# Altium PCB 电机控制.PcbDoc (part 3 of 4)
Units mil, origin at the board's own origin, x right, y up, seen from the top; angles counter-clockwise.
Board outline 4818.9 x 3440.94 mil, 2 copper layers (Top Layer, Bottom Layer); 168 components, 177 nets, 592 pads, 87 vias.
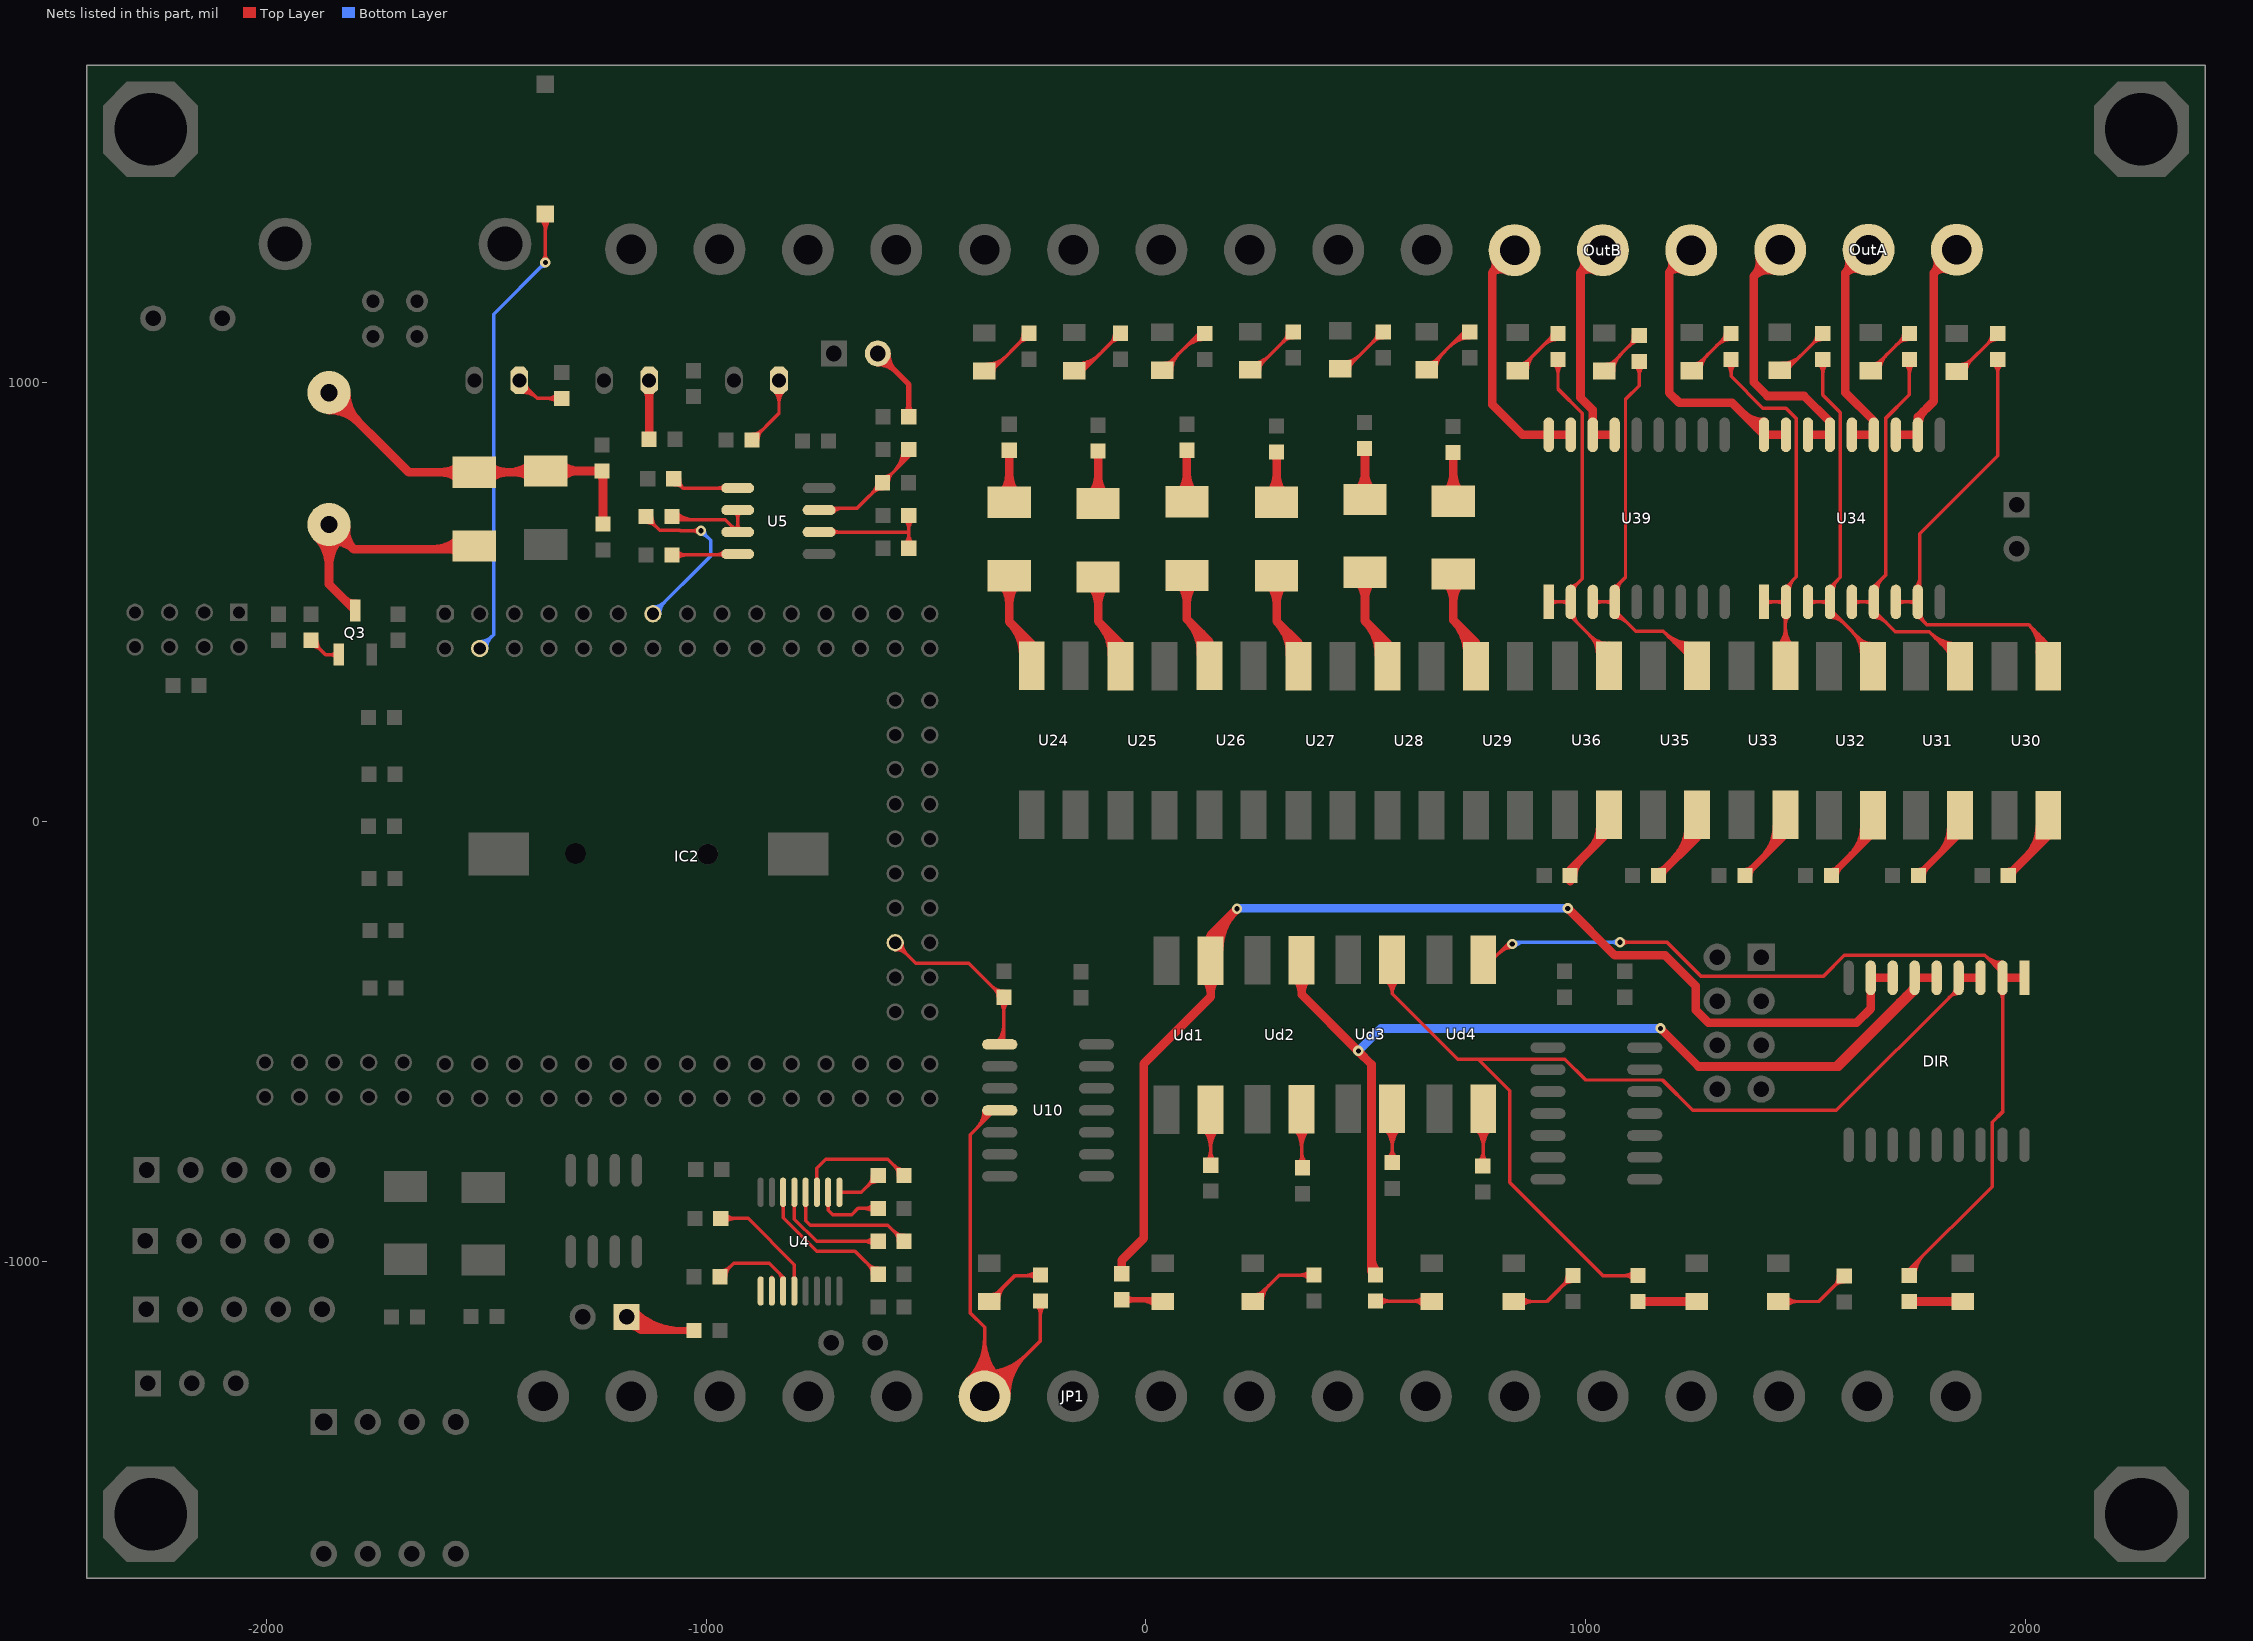
[diagram p3: the nets of this part, all layers, seen from the top]

## Via types
v1: diameter 23.62, hole 11.81, Top Layer to Bottom Layer, 87 vias

## Nets (pads, with @x,y where several pads share a name; then routed paths per layer and width w, separated by ;. In a path a pad name is that pad's centre, name@x,y a point inside that pad or via, vN(x,y) a via of type N, cw(c..) or ccw(c..) an arc to the next point about the centre after c; other vN are vias at no path point) (continued)
NetC18_1: C18.1 C19.1 D8.K D9.K U3.1 | length 1428.6
  Top Layer w19.68: U3.1@-1858,936.63 cw(c-1858,841.58) -1790.79,908.79 cw(c-1723.58,976) U3.1@-1818.63,976 ; U3.1@-1858,976 -1676.82,794.82 -1626,794.82 D8.K@-1527.95,794.82 D9.K@-1367.95,794.82 ; D8.K@-1559.83,776.72 ccw(c-1603.51,733.04) -1603.51,794.82 ccw(c-1603.51,856.6) D8.K@-1559.83,812.91 ; D8.K@-1496.08,776.72 cw(c-1452.39,733.04) -1452.39,794.82 cw(c-1452.39,856.6) D8.K@-1496.08,812.91 ; -1447.76,794.82 ccw(c-1447.76,866.84) D9.K@-1396.83,815.91 ; -1433.27,794.82 cw(c-1433.27,743.28) D9.K@-1396.83,779.72 ; D9.K@-1364.95,797.82 -1236.82,797.82 -1235,796 C18.1@-1235,677 ; D9.K@-1333.08,779.72 cw(c-1289.39,736.04) -1289.39,797.82 cw(c-1289.39,859.6) D9.K@-1333.08,815.91 ; -1255.49,797.82 ccw(c-1255.49,816.49) C19.1@-1242.29,803.29 ; -1254.62,797.82 cw(c-1254.62,780.37) -1242.29,792.71 cw(c-1259.89,775.11) -1235,775.11 ; C18.1@-1240.29,682.29 ccw(c-1253.06,695.06) -1235,695.06 ccw(c-1216.94,695.06) C18.1@-1229.71,682.29
NetC21_1: C21.1 U4.1 | length 166
  Top Layer w7.87: U4.1@-697.36,-842.73 -647.32,-842.73 C21.1@-609.17,-804.58 ; U4.1@-695.27,-844.82 cw(c-690.23,-849.86) -690.23,-842.73 cw(c-690.23,-835.61) U4.1@-695.27,-840.65 ; C21.1@-622.56,-804.58 cw(c-654.87,-804.58) -632.02,-827.43 cw(c-609.17,-850.28) C21.1@-609.17,-817.97
NetC21_2: C21.2 U4.3 | length 338.8
  Top Layer w7.87: U4.3@-750.63,-814.07 ccw(c-755.67,-809.03) -748.54,-809.03 ccw(c-741.41,-809.03) U4.3@-746.45,-814.07 ; U4.3@-748.54,-842.73 -748.54,-787.91 -728.35,-767.72 -586.98,-767.72 C21.2@-550.12,-804.58 ; C21.2@-563.5,-804.58 ccw(c-595.82,-804.58) -572.97,-781.73 ccw(c-550.12,-758.88) C21.2@-550.12,-791.2
NetC22_1: C22.1 U4.5 | length 334.4
  Top Layer w7.87: U4.5@-801.81,-871.4 cw(c-806.85,-876.44) -799.72,-876.44 cw(c-792.6,-876.44) U4.5@-797.64,-871.4 ; U4.5@-799.72,-842.73 -799.72,-903.65 -749.19,-954.19 C22.1@-609.17,-954.19 ; C22.1@-618.64,-963.65 ccw(c-641.49,-986.5) -641.49,-954.19 ccw(c-641.49,-921.87) C22.1@-618.64,-944.72
NetC22_2: C22.2 U4.4 | length 369.8
  Top Layer w7.87: U4.4@-776.22,-871.4 cw(c-781.26,-876.44) -774.13,-876.44 cw(c-767.01,-876.44) U4.4@-772.05,-871.4 ; U4.4@-774.13,-842.73 -774.13,-906.97 -763.78,-917.32 -586.98,-917.32 C22.2@-550.12,-954.19 ; C22.2@-563.5,-954.19 ccw(c-595.82,-954.19) -572.97,-931.34 ccw(c-550.12,-908.49) C22.2@-550.12,-940.8
NetC23_1: C23.1 U4.2 | length 226.6
  Top Layer w7.87: U4.2@-725.04,-871.4 cw(c-730.08,-876.44) -722.95,-876.44 cw(c-715.82,-876.44) U4.2@-720.86,-871.4 ; U4.2@-722.95,-842.73 -722.95,-883.35 -712.6,-893.7 -669.29,-893.7 -654.98,-879.39 C23.1@-609.17,-879.39 ; C23.1@-618.64,-888.85 ccw(c-641.49,-911.7) -641.49,-879.39 ccw(c-641.49,-847.07) C23.1@-618.64,-869.92
NetC24_1: C24.1 U4.6 | length 389
  Top Layer w7.87: U4.6@-827.4,-871.4 cw(c-832.44,-876.44) -825.31,-876.44 cw(c-818.19,-876.44) U4.6@-823.23,-871.4 ; U4.6@-825.31,-842.73 -825.31,-900.33 -749.27,-976.38 -661.79,-976.38 C24.1@-609.17,-1028.99 ; C24.1@-622.56,-1028.99 ccw(c-654.87,-1028.99) -632.02,-1006.14 ccw(c-609.17,-983.29) C24.1@-609.17,-1015.61
NetD8_A: D8.A Q3.3 U3.2 | length 962.9
  Top Layer w19.68: U3.2@-1885.84,648.16 cw(c-1953.05,580.95) -1858,580.95 cw(c-1762.95,580.95) U3.2@-1830.16,648.16 ; U3.2@-1852.61,637 cw(c-1844.4,577.6) -1802,620 ; -1823.87,505.88 ccw(c-1798,531.75) Q3.3@-1798,495.16 ; U3.2@-1819,670.61 ccw(c-1759.6,662.4) -1802,620 ; Q3.3@-1798,480 -1858,540 U3.2@-1858,676 -1802,620 ; -1621.61,620 ccw(c-1621.61,707.37) D8.A@-1559.83,645.59 ; -1585.42,620 cw(c-1585.42,583.81) D8.A@-1559.83,609.4 ; D8.A@-1527.95,627.49 -1535.45,620 -1802,620
NetD24_A: D24.A U24.2 | length 449
  Top Layer w19.68: D24.A@-329.05,541.4 cw(c-372.73,497.72) -310.95,497.72 cw(c-249.17,497.72) D24.A@-292.86,541.4 ; D24.A@-310.95,559.5 -310.95,454.95 -259.82,403.82 U24.2@-259.82,354.81 ; -309.98,453.98 cw(c-383.56,380.4) U24.2@-279.5,380.4 ; -276.38,420.38 cw(c-316.35,380.4) U24.2@-259.82,380.4
NetD24_K: D24.K R64.1 | length 243.5
  Top Layer w19.68: D24.K@-329.05,744.91 ccw(c-372.73,788.6) -310.95,788.6 ccw(c-249.17,788.6) D24.K@-292.86,744.91 ; R64.1@-316.29,839.71 cw(c-329.18,826.82) -310.95,826.82 ; D24.K@-310.95,726.82 R64.1@-310.95,844.95 ; -310.95,827.06 cw(c-293.06,827.06) R64.1@-305.71,839.71
NetD25_A: D25.A U25.2 | length 453.7
  Top Layer w19.68: D25.A@-127.05,538.4 cw(c-170.73,494.72) -108.95,494.72 cw(c-47.17,494.72) D25.A@-90.86,538.4 ; D25.A@-108.95,556.5 -108.95,455.95 ; U25.2@-77.5,379.5 ccw(c-184.87,380.03) -108.95,455.95 ; -75.58,422.58 cw(c-118.46,379.7) U25.2@-57.82,379.4 ; U25.2@-57.82,353.81 -57.82,404.82 -108.95,455.95
NetD25_K: D25.K R65.1 | length 244.5
  Top Layer w19.68: D25.K@-127.05,741.91 ccw(c-170.73,785.6) -108.95,785.6 ccw(c-47.17,785.6) D25.K@-90.86,741.91 ; R65.1@-114.29,837.71 cw(c-127.18,824.83) -108.95,824.83 ; D25.K@-108.95,723.82 R65.1@-108.95,842.95 ; -108.95,825.06 cw(c-91.06,825.06) R65.1@-103.71,837.71
NetD26_A: D26.A U26.2 | length 465.9
  Top Layer w19.68: D26.A@74.95,542.4 cw(c31.27,498.72) 93.05,498.72 cw(c154.83,498.72) D26.A@111.14,542.4 ; D26.A@93.05,560.5 93.05,460.95 ; U26.2@124.51,381.09 ccw(c16.95,384.85) 93.05,460.95 ; 125.06,428.94 cw(c78.81,382.69) U26.2@144.18,380.4 ; U26.2@144.18,354.81 144.18,409.82 93.05,460.95
NetD26_K: D26.K R66.1 | length 242.5
  Top Layer w19.68: D26.K@74.95,745.91 ccw(c31.27,789.6) 93.05,789.6 ccw(c154.83,789.6) D26.K@111.14,745.91 ; R66.1@87.71,839.71 cw(c74.83,826.83) 93.05,826.83 ; D26.K@93.05,727.82 R66.1@93.05,844.95 ; 93.05,827.05 cw(c110.95,827.05) R66.1@98.29,839.71
NetD27_A: D27.A U27.2 | length 456.5
  Top Layer w19.68: D27.A@278.95,541.4 cw(c235.27,497.72) 297.05,497.72 cw(c358.83,497.72) D27.A@315.14,541.4 ; D27.A@297.05,559.5 297.05,455.95 ; U27.2@327.5,379.87 ccw(c223.46,382.36) 297.05,455.95 ; 329.55,423.45 cw(c286.94,380.84) U27.2@347.18,379.4 ; U27.2@347.18,353.81 347.18,405.82 297.05,455.95
NetD27_K: D27.K R67.1 | length 239.5
  Top Layer w19.68: D27.K@278.95,744.91 ccw(c235.27,788.6) 297.05,788.6 ccw(c358.83,788.6) D27.K@315.14,744.91 ; R67.1@291.71,835.71 cw(c278.83,822.83) 297.05,822.83 ; D27.K@297.05,726.82 R67.1@297.05,840.95 ; 297.05,823.05 cw(c314.95,823.05) R67.1@302.29,835.71
NetD28_A: D28.A U28.2 | length 467.3
  Top Layer w19.68: D28.A@479.91,549.55 cw(c436.22,505.86) 498,505.86 cw(c559.78,505.86) D28.A@516.1,549.55 ; D28.A@498,567.64 498,457 ; U28.2@529.5,379.64 ccw(c421.95,380.94) 498,457 ; 531.04,423.96 cw(c487.23,380.15) U28.2@549.18,379.4 ; U28.2@549.18,353.81 549.18,405.82 498,457
NetD28_K: D28.K R68.1 | length 228.9
  Top Layer w19.68: D28.K@479.91,751.09 ccw(c436.22,794.78) 498,794.78 ccw(c559.78,794.78) D28.K@516.1,751.09 ; R68.1@491.71,843.71 cw(c476.52,828.52) 498,828.52 ; D28.K@498,733 R68.1@498,848
NetD29_A: D29.A U29.2 | length 467.8
  Top Layer w19.68: D29.A@680.91,545.55 cw(c637.22,501.86) 699,501.86 cw(c760.78,501.86) D29.A@717.1,545.55 ; D29.A@699,563.64 699,459 ; U29.2@730.5,379.94 ccw(c622.86,382.86) 699,459 ; 731.36,426.64 cw(c685.87,381.15) U29.2@750.18,379.4 ; U29.2@750.18,353.81 750.18,407.82 699,459
NetD29_K: D29.K R69.1 | length 223.9
  Top Layer w19.68: D29.K@680.91,747.09 ccw(c637.22,790.78) 699,790.78 ccw(c760.78,790.78) D29.K@717.1,747.09 ; R69.1@692.71,834.71 cw(c677.53,819.53) 699,819.53 ; D29.K@699,729 R69.1@699,839
NetDdir1_A: Ddir1.A Rd5.2 | length 190.2
  Top Layer w11.81: Rd5.2@-55,-1087.06 34.05,-1087.06 Ddir1.A@38,-1091 ; Rd5.2@-46.93,-1095.13 cw(c-27.44,-1114.62) -27.44,-1087.06 cw(c-27.44,-1059.49) Rd5.2@-46.93,-1078.98 ; -10.7,-1087.06 cw(c-10.7,-1133.8) Ddir1.A@22.35,-1100.75 ; 8.36,-1087.06 ccw(c8.36,-1067.27) Ddir1.A@22.35,-1081.26
NetDdir1_K: 
NetDdir2_A: Ddir2.A Rd6.2 | length 256.3
  Top Layer w7.87: Rd6.2@522,-1090.06 649.05,-1090.06 Ddir2.A@650,-1091 ; Rd6.2@531.47,-1099.52 cw(c554.32,-1122.37) 554.32,-1090.06 cw(c554.32,-1057.74) Rd6.2@531.47,-1080.59 ; 603.79,-1090.06 cw(c603.79,-1131.31) Ddir2.A@632.96,-1102.14 ; 608.37,-1090.06 ccw(c608.37,-1055.27) Ddir2.A@632.96,-1079.87 ; 622.8,-1090.06 cw(c622.8,-1112.3) Ddir2.A@638.53,-1096.57
NetDdir3_A: Ddir3.A Rd7.2 | length 199.6
  Top Layer w19.68: Rd7.2@1119,-1091.06 Ddir3.A@1252.95,-1091.06 ; Rd7.2@1124.29,-1096.34 cw(c1137.06,-1109.11) 1137.06,-1091.06 cw(c1137.06,-1073) Rd7.2@1124.29,-1085.77 ; 1223.21,-1091.06 ccw(c1223.21,-1067.12) Ddir3.A@1240.14,-1084.04 ; 1223.46,-1091.06 cw(c1223.46,-1114.64) Ddir3.A@1240.14,-1097.96
NetDdir4_A: Ddir4.A Rd8.2 | length 186.6
  Top Layer w19.68: Rd8.2@1736,-1091.06 Ddir4.A@1856.95,-1091.06 ; Rd8.2@1741.29,-1096.34 cw(c1754.06,-1109.11) 1754.06,-1091.06 cw(c1754.06,-1073) Rd8.2@1741.29,-1085.77 ; 1827.2,-1091.06 ccw(c1827.2,-1067.1) Ddir4.A@1844.14,-1084.04 ; 1827.47,-1091.06 cw(c1827.47,-1114.63) Ddir4.A@1844.14,-1097.96
NetDIR_1: DIR.1 DIR.2 Rd8.1 Ud4.3 | length 2460.1
  Top Layer w7.87: Ud4.3@767,-314.23 787.77,-314.23 824,-278 v1(833,-278) ccw(c833,-299.73) 817.64,-284.36 ; 804.19,-297.81 cw(c833,-326.61) v1@833,-285.87 ; v1(1078,-274) 1185,-274 1261.81,-350.81 1541.22,-350.81 1588.22,-303.82 1907.79,-303.82 1948,-344.03 DIR.2@1948,-355 1948,-660.12 1924.38,-683.74 1924.38,-829.62 1736,-1018 Rd8.1@1736,-1032 ; v1@1083.57,-279.57 cw(c1097.01,-293.01) 1097.01,-274 cw(c1097.01,-254.99) v1@1083.57,-268.43 ; Rd8.1@1733.64,-1032 cw(c1761.73,-1032) 1741.87,-1012.13 ; Rd8.1@1741.51,-1032 cw(c1788.62,-1032) 1755.31,-998.69 ; Rd8.1@1749.39,-1032 cw(c1815.5,-1032) 1768.75,-985.25 ; 1907.79,-303.82 ccw(c1945.89,-265.72) DIR.2@1947.73,-319.57 ; 1920.6,-316.64 ccw(c1946.74,-290.5) DIR.2@1948,-327.44 ; 1933.42,-329.45 ccw(c1947.59,-315.29) DIR.2@1948.27,-335.31 ; DIR.2@1942.43,-388.13 cw(c1928.99,-401.57) 1948,-401.57 cw(c1967.01,-401.57) DIR.2@1953.57,-388.13 ; DIR.2@1946.24,-342.27 ccw(c1948.43,-340.08) DIR.2@1948.54,-343.18
  Top Layer w19.68: DIR.2@1948,-355 DIR.1@1998,-355
  Bottom Layer w7.87: v1(833,-278) 837,-274 v1(1078,-274) ; v1@838.57,-283.57 cw(c861.67,-306.67) 861.67,-274 ; v1@1072.43,-279.57 ccw(c1058.99,-293.01) 1058.99,-274 ccw(c1058.99,-254.99) v1@1072.43,-268.43
NetDIR_3: DIR.3 DIR.4 Rd7.1 Ud3.3 | length 2554.1
  Top Layer w7.87: Ud3.3@544.65,-360.29 cw(c521.62,-391) 560,-391 ; Ud3.3@549.37,-353.99 cw(c533.43,-375.25) 560,-375.25 cw(c586.57,-375.25) Ud3.3@570.63,-353.99 ; Ud3.3@560,-314.23 560,-391 ; Ud3.3@575.35,-360.29 ccw(c598.38,-391) 560,-391 ; 755.19,-539.65 827,-611.46 827,-820.41 1038.59,-1032 Rd7.1@1119,-1032 ; Rd7.1@1109.54,-1041.46 ccw(c1086.68,-1064.32) 1086.68,-1032 ccw(c1086.68,-999.68) Rd7.1@1109.54,-1022.53 ; 1827.28,-399.01 cw(c1848,-419.74) DIR.4@1848,-390.43 ; 1837.57,-388.72 ccw(c1831.41,-382.56) DIR.4@1840.13,-382.56 ; DIR.4@1848,-355 1848,-378.29 1570.3,-656 1243.32,-656 1174.6,-587.28 999.84,-587.28 952.22,-539.65 708.65,-539.65 560,-391
  Top Layer w19.68: DIR.4@1848,-355 DIR.3@1898,-355
NetDIR_5: DIR.5 DIR.6 Rd6.1 Ud2.3 | length 2729.7
  Top Layer w7.87: 1555,-561 1559.28,-556.72 1748,-368 DIR.6@1748,-355 ; 1709.71,-406.29 cw(c1748,-444.59) DIR.6@1748,-390.43 ; 1723.15,-392.85 cw(c1748,-417.71) DIR.6@1748,-382.56 ; DIR.6@1736.59,-379.41 cw(c1748,-390.82) DIR.6@1748,-374.68
  Top Layer w19.68: Ud2.3@340.08,-354.74 cw(c306.48,-388.34) 354,-388.34 cw(c401.52,-388.34) Ud2.3@367.92,-354.74 ; Ud2.3@354,-315.23 354,-393 v1@483,-522 ; v1(483,-521) v1@483,-522 ; 512.76,-990.62 ccw(c562.38,-990.62) Rd6.1@527.29,-1025.71 ; Rd6.1@522,-1031 512.76,-1021.75 512.76,-551.76 v1@483,-522 ; v1(1170,-470) 1256.72,-556.72 1559.28,-556.72 1575.28,-556.72 1748,-384 DIR.6@1748,-368 ; DIR.6@1748,-355 DIR.5@1798,-355
  Bottom Layer w19.68: v1@482,-522 534,-470 v1(1170,-470)
NetDIR_7: DIR.7 DIR.8 Rd5.1 Ud1.3 | length 2954.4
  Top Layer w19.68: Rd5.1@-60.29,-1022.71 ccw(c-73.22,-1009.77) -54.93,-1009.77 ; Rd5.1@-54.93,-1028 -54.93,-996.93 -5.31,-947.31 -5.31,-550.31 147,-398 Ud1.3@147,-316.23 147,-258 ; -54.93,-1010.11 ccw(c-37.11,-1010.11) Rd5.1@-49.71,-1022.71 ; Ud1.3@133.08,-355.74 cw(c99.48,-389.34) 147,-389.34 cw(c194.52,-389.34) Ud1.3@160.92,-355.74 ; Ud1.3@137.82,-273.23 ccw(c129.79,-258) 147,-258 ; Ud1.3@147,-290.64 cw(c225.8,-290.64) 170.08,-234.92 ; Ud1.3@156.18,-273.23 cw(c164.22,-258) 147,-258 ; Ud1.3@166.69,-290.64 cw(c293.01,-290.64) v1@203.68,-201.32 ; v1(207,-198) 147,-258 ; v1(959.12,-196.88) 1065.77,-303.53 1180.53,-303.53 1250.28,-373.28 1250.28,-428.18 1278.82,-456.72 1616.28,-456.72 1648,-425 DIR.8@1648,-355 DIR.7@1698,-355
  Bottom Layer w19.68: v1(207,-198) 208.12,-196.88 v1(959.12,-196.88)
NetJ9_1: J9.1 R15.2 | length 546.5
  Top Layer w15.75: J9.1@-1188.06,-1132.94 ccw(c-1129.98,-1074.87) -1129.98,-1157 ; J9.1@-1181.1,-1125.98 -1150.09,-1157 ; J9.1@-1178.26,-1147.45 cw(c-1173.84,-1180.76) -1150.09,-1157 ; J9.1@-1176.93,-1121.81 ccw(c-1091.97,-1036.85) -1091.97,-1157 ; J9.1@-1165.79,-1110.67 ccw(c-1053.95,-998.83) -1053.95,-1157 ; J9.1@-1159.64,-1128.83 ccw(c-1126.33,-1133.24) -1150.09,-1157 ; R15.2@-1034.74,-1163.68 ccw(c-1050.87,-1179.81) -1050.87,-1157 ccw(c-1050.87,-1134.19) R15.2@-1034.74,-1150.32 ; R15.2@-1028.06,-1157 -1150.09,-1157
NetLED1_A: LED1.A R1.2 | length 246.7
  Top Layer w7.87: LED1.A@-1425.2,1003.94 -1384.2,962.94 ; LED1.A@-1424.23,984.31 cw(c-1420.14,949.95) -1395.68,974.42 ; LED1.A@-1423.3,976.49 cw(c-1417.7,929.46) -1384.21,962.95 ; LED1.A@-1409.13,992.44 ccw(c-1398.12,992.44) LED1.A@-1405.91,984.65 ; R1.2@-1338.46,953.48 ccw(c-1361.32,930.63) -1361.32,962.95 ccw(c-1361.32,995.26) R1.2@-1338.46,972.41 ; R1.2@-1329,962.94 -1384.2,962.94
NetLED2_A: LED2.A R16.2 | length 200.9
  Top Layer w19.68: LED2.A@-1137.1,985.25 cw(c-1154.44,967.91) -1129.92,967.91 cw(c-1105.4,967.91) LED2.A@-1122.74,985.25 ; R16.2@-1135.34,875.29 ccw(c-1148.44,888.38) -1129.92,888.38 ; R16.2@-1130.05,870 -1129.92,870.13 LED2.A@-1129.92,1003.94 ; -1129.92,887.73 ccw(c-1112.32,887.73) R16.2@-1124.77,875.29
NetLED3_A: LED3.A R17.2 | length 273
  Top Layer w7.87: R17.2@-895.94,868 -834.65,929.3 LED3.A@-834.65,1003.94 ; R17.2@-895.94,881.39 ccw(c-895.94,913.7) -873.09,890.85 ccw(c-850.24,868) R17.2@-882.56,868 ; LED3.A@-846.01,981.08 cw(c-873.43,953.66) -834.65,953.66 cw(c-795.87,953.66) LED3.A@-823.29,981.08
NetLED10_A: LED10.A R30.2 | length 278.1
  Top Layer w7.87: LED10.A@-357,-1091 -297.94,-1031.95 R30.2@-240,-1031.95 ; LED10.A@-351.09,-1075.26 ccw(c-351.09,-1051.49) -334.29,-1068.3 ; LED10.A@-343.22,-1091 cw(c-309.95,-1091) -333.48,-1067.48 ; LED10.A@-335.35,-1091 cw(c-283.07,-1091) -320.03,-1054.04 ; -274.73,-1031.95 ccw(c-274.73,-996.22) R30.2@-249.46,-1021.48 ; -269.9,-1031.95 cw(c-269.9,-1060.85) R30.2@-249.46,-1040.41
NetLED12_A: LED12.A R32.2 | length 300.5
  Top Layer w7.87: LED12.A@243,-1091 303.06,-1030.95 R32.2@382,-1030.95 ; LED12.A@248.91,-1075.26 ccw(c248.91,-1051.49) 265.71,-1068.3 ; LED12.A@256.78,-1091 cw(c290.05,-1091) 266.52,-1067.48 ; LED12.A@264.65,-1091 cw(c316.93,-1091) 279.97,-1054.04 ; R32.2@372.53,-1040.41 ccw(c349.68,-1063.26) 349.68,-1030.95 ccw(c349.68,-998.63) R32.2@372.53,-1021.48
NetLED14_A: LED14.A R34.2 | length 269.9
  Top Layer w7.87: LED14.A@836,-1091 911.94,-1091 R34.2@971,-1031.95 ; LED14.A@853.04,-1102.14 cw(c879.93,-1129.02) 879.93,-1091 cw(c879.93,-1052.98) LED14.A@853.04,-1079.87 ; R34.2@957.62,-1031.95 cw(c925.3,-1031.95) 948.15,-1054.8 cw(c971,-1077.65) R34.2@971,-1045.33
NetLED16_A: LED16.A R36.2 | length 284.5
  Top Layer w7.87: LED16.A@1438,-1091 1529.94,-1091 R36.2@1588,-1032.95 ; LED16.A@1455.04,-1102.14 cw(c1481.93,-1129.02) 1481.93,-1091 cw(c1481.93,-1052.98) LED16.A@1455.04,-1079.87 ; R36.2@1574.61,-1032.95 cw(c1542.3,-1032.95) 1565.15,-1055.8 cw(c1588,-1078.65) R36.2@1588,-1046.33
NetLED27_A: LED27.A R76.2 | length 277.7
  Top Layer w7.87: LED27.A@1648,1026 1732.24,1110.24 R76.2@1736.22,1110.24 ; LED27.A@1653.9,1041.75 ccw(c1653.9,1065.51) 1670.71,1048.71 ; LED27.A@1661.78,1026 cw(c1695.05,1026) 1671.52,1049.52 ; LED27.A@1669.65,1026 cw(c1721.93,1026) 1684.96,1062.96 ; 1706.57,1084.57 cw(c1736.22,1054.92) R76.2@1736.22,1096.85 ; 1716.19,1094.19 ccw(c1700.14,1110.24) R76.2@1722.84,1110.24 ; R76.2@1720.01,1098.01 cw(c1736.22,1081.8) R76.2@1736.22,1104.73
NetLED28_A: LED28.A R77.2 | length 275.8
  Top Layer w7.87: LED28.A@1441,1027 1456.13,1027 R77.2@1539.37,1110.24 ; LED28.A@1446.91,1034.87 ccw(c1446.91,1076.16) 1476.1,1046.97 ; LED28.A@1446.91,1042.75 ccw(c1446.91,1103.04) 1489.54,1060.41 ; LED28.A@1462.65,1027 cw(c1478.39,1027) 1467.26,1038.13 ; R77.2@1525.99,1110.24 cw(c1493.67,1110.24) 1516.52,1087.39 cw(c1539.37,1064.53) R77.2@1539.37,1096.85
NetLED29_A: LED29.A R78.2 | length 282
  Top Layer w7.87: LED29.A@1241,1026 1325.24,1110.24 R78.2@1330.71,1110.24 ; LED29.A@1246.91,1041.75 ccw(c1246.91,1065.51) 1263.71,1048.71 ; LED29.A@1254.78,1026 cw(c1288.05,1026) 1264.52,1049.52 ; LED29.A@1262.65,1026 cw(c1314.93,1026) 1277.97,1062.96 ; 1298.52,1083.52 cw(c1330.71,1051.33) R78.2@1330.71,1096.85 ; 1311.73,1096.73 ccw(c1298.21,1110.24) R78.2@1317.32,1110.24 ; 1311.96,1096.96 cw(c1330.71,1078.21) R78.2@1330.71,1104.73
NetLED30_A: LED30.A R79.2 | length 253.5
  Top Layer w7.87: LED30.A@1044.68,1025 LED30.A@1042,1025 1122,1105 R79.2@1122,1106.06 ; LED30.A@1047.9,1040.75 ccw(c1047.9,1064.51) 1064.71,1047.71 ; LED30.A@1055.78,1025 cw(c1089.05,1025) 1065.52,1048.52 ; LED30.A@1063.65,1025 cw(c1115.93,1025) 1078.96,1061.96 ; 1098.4,1081.4 ccw(c1073.75,1106.06) R79.2@1108.61,1106.06 ; 1100.95,1083.95 cw(c1122,1062.9) R79.2@1122,1092.67
NetLED31_A: LED31.A R80.2 | length 285.8
  Top Layer w7.87: LED31.A@846,1026 930.24,1110.24 R80.2@937.01,1110.24 ; LED31.A@851.9,1041.75 ccw(c851.9,1065.51) 868.71,1048.71 ; LED31.A@859.78,1026 cw(c893.05,1026) 869.52,1049.52 ; LED31.A@867.65,1026 cw(c919.93,1026) 882.96,1062.97 ; 902.6,1082.6 cw(c937.01,1048.19) R80.2@937.01,1096.85 ; 916.04,1096.04 cw(c937.01,1075.07) R80.2@937.01,1104.73 ; 918.94,1098.94 ccw(c907.65,1110.24) R80.2@923.62,1110.24
NetLED32_A: LED32.A R23.2 | length 282.1
  Top Layer w7.87: LED32.A@-368,1025 -352.06,1025 R23.2@-266,1111.06 ; LED32.A@-362.1,1032.87 ccw(c-362.1,1076.12) -331.52,1045.54 ; LED32.A@-362.1,1040.75 ccw(c-362.1,1103) -318.08,1058.98 ; LED32.A@-346.35,1025 cw(c-332.56,1025) -342.31,1034.75 ; R23.2@-279.39,1111.06 cw(c-311.7,1111.06) -288.85,1088.21 cw(c-266,1065.35) R23.2@-266,1097.67
NetLED33_A: LED33.A R24.2 | length 315.6
  Top Layer w7.87: LED33.A@-163,1026 -143.06,1026 R24.2@-58,1111.06 ; LED33.A@-157.1,1026 ccw(c-157.1,1059.89) -133.13,1035.92 ; LED33.A@-157.1,1033.87 ccw(c-157.1,1086.77) -119.69,1049.37 ; LED33.A@-157.1,1041.75 ccw(c-157.1,1113.65) -106.25,1062.81 ; R24.2@-71.39,1111.06 cw(c-103.7,1111.06) -80.85,1088.21 cw(c-58,1065.35) R24.2@-58,1097.67
NetLED34_A: LED34.A R25.2 | length 326
  Top Layer w7.87: LED34.A@37,1027 120.24,1110.24 R25.2@133.86,1110.24 ; LED34.A@42.9,1042.75 ccw(c42.9,1066.51) 59.71,1049.71 ; LED34.A@50.78,1027 cw(c84.05,1027) 60.52,1050.52 ; LED34.A@58.65,1027 cw(c110.93,1027) 73.96,1063.96 ; 87.76,1077.76 cw(c133.86,1031.65) R25.2@133.86,1096.85 ; 101.2,1091.2 cw(c133.86,1058.54) R25.2@133.86,1104.73 ; 114.64,1104.64 cw(c133.86,1085.42) R25.2@133.86,1112.6
NetLED35_A: LED35.A R26.2 | length 269.3
  Top Layer w7.87: LED35.A@237,1028 248.47,1028 R26.2@334.65,1114.17 ; LED35.A@242.9,1035.87 ccw(c242.9,1068.32) 265.85,1045.38 ; LED35.A@242.9,1043.75 ccw(c242.9,1095.2) 279.29,1058.82 ; LED35.A@258.65,1028 cw(c283.24,1028) 265.85,1045.38 ; R26.2@321.26,1114.17 cw(c288.94,1114.17) 311.79,1091.32 cw(c334.65,1068.47) R26.2@334.65,1100.79
NetLED36_A: LED36.A R27.2 | length 271.5
  Top Layer w7.87: LED36.A@442,1030 455.2,1030 R27.2@539.37,1114.17 ; LED36.A@447.91,1037.87 ccw(c447.91,1074.49) 473.8,1048.6 ; LED36.A@447.91,1045.75 ccw(c447.91,1101.37) 487.24,1062.04 ; LED36.A@463.65,1030 cw(c484.07,1030) 469.63,1044.43 ; R27.2@525.99,1114.17 cw(c493.67,1114.17) 516.52,1091.32 cw(c539.37,1068.47) R27.2@539.37,1100.79
NetLED37_A: LED37.A R28.2 | length 301.3
  Top Layer w7.87: LED37.A@638,1028 724.18,1114.17 R28.2@736.22,1114.17 ; LED37.A@643.91,1043.75 ccw(c643.91,1067.51) 660.71,1050.71 ; LED37.A@651.78,1028 cw(c685.05,1028) 661.52,1051.52 ; LED37.A@659.65,1028 cw(c711.93,1028) 674.97,1064.97 ; 692.81,1082.81 cw(c736.22,1039.39) R28.2@736.22,1100.79 ; 706.25,1096.25 cw(c736.22,1066.28) R28.2@736.22,1108.66
NetLED260_A: LED260.A R750.2 | length 255.8
  Top Layer w7.87: LED260.A@1844,1024 1850.77,1024 R750.2@1937.01,1110.24 ; LED260.A@1849.91,1031.87 ccw(c1849.91,1052.97) LED260.A@1864.82,1038.05 ; LED260.A@1849.91,1039.75 ccw(c1849.91,1079.85) 1878.26,1051.49 ; LED260.A@1865.65,1024 cw(c1901.59,1024) 1876.18,1049.41 ; R750.2@1923.62,1110.24 cw(c1891.31,1110.24) 1914.16,1087.39 cw(c1937.01,1064.53) R750.2@1937.01,1096.85
NetP1_2: P1.2 R485.1 | length 305.9
  Top Layer w11.81: P1.2@-610,1041.38 cw(c-610,984.35) -569.68,1024.68 cw(c-529.35,1065) P1.2@-586.38,1065 ; P1.2@-610,1065 -539.37,994.37 R485.1@-539.37,921.26 ; R485.1@-547.44,929.33 ccw(c-566.93,948.82) -539.37,948.82 ccw(c-511.81,948.82) R485.1@-531.3,929.33
NetQ3_1: Q3.1 R2.2 | length 168.3
  Top Layer w7.87: R2.2@-1899,399.56 cw(c-1899,367.24) -1876.15,390.09 cw(c-1853.3,412.94) R2.2@-1885.62,412.94 ; R2.2@-1895.47,402.47 R2.2@-1899,412.94 -1866.06,380 Q3.1@-1836,380 ; Q3.1@-1841.57,374.43 ccw(c-1855.01,360.99) -1855.01,380 ccw(c-1855.01,399.01) Q3.1@-1841.57,385.57
NetR3_2: R3.2 U4.12 | length 332.7
  Top Layer w7.87: R3.2@-966.95,-902 -905,-902 -799.72,-1007.28 U4.12@-799.72,-1067.14 ; R3.2@-957.48,-911.47 cw(c-934.63,-934.32) -934.63,-902 cw(c-934.63,-869.68) R3.2@-957.48,-892.54 ; U4.12@-801.81,-1038.48 ccw(c-806.85,-1033.44) -799.72,-1033.44 ccw(c-792.6,-1033.44) U4.12@-797.64,-1038.48
NetR4_2: R4.2 U4.11 | length 266.7
  Top Layer w7.87: R4.2@-968.95,-1035 -937.95,-1004 -857,-1004 -825.31,-1035.69 U4.11@-825.31,-1067.14 ; R4.2@-968.95,-1021.61 ccw(c-968.95,-989.3) -946.09,-1012.15 ccw(c-923.24,-1035) R4.2@-955.56,-1035 ; -833.81,-1027.19 cw(c-847.18,-1040.57) U4.11@-828.27,-1040.57
NetR5_2: U4.10 | length 30.9
  Top Layer w7.87: U4.10@-850.9,-1067.14 U4.10@-850.9,-1036.27
NetR6_2: U4.9
NetR7_2: R7.2 U5.1 | length 228.5
  Top Layer w7.87: R7.2@-1073.94,780 -1052.94,759 ; R7.2@-1073.12,766.64 cw(c-1071.51,740.43) -1052.94,759 ; R7.2@-1060.58,779.18 ccw(c-1034.38,777.57) -1052.94,759 ; U5.1@-959.68,753.43 ccw(c-973.12,739.99) -973.12,759 ccw(c-973.12,778.01) U5.1@-959.68,764.57 ; U5.1@-928.52,759 -1052.94,759
NetR8_2: R8.2 U5.2 U5.3 | length 347
  Top Layer w7.87: R8.2@-1077.94,694 -1070.95,687 -956.52,687 U5.3@-928.52,659 U5.2@-928.52,709 ; R8.2@-1074.05,697.9 ccw(c-1047.74,724.2) -1047.74,687 ; R8.2@-1068.48,703.46 ccw(c-1028.73,743.21) -1028.73,687 ; U5.3@-934.09,664.57 ccw(c-947.53,678.01) -928.52,678.01 ccw(c-909.51,678.01) U5.3@-922.95,664.57 ; U5.2@-934.09,703.43 cw(c-947.53,689.99) -928.52,689.99 cw(c-909.51,689.99) U5.2@-922.95,703.43
NetR9_2: R9.2 U5.4 | length 230.9
  Top Layer w7.87: R9.2@-1077.94,607 -930.52,607 U5.4@-928.52,609 ; R9.2@-1068.48,597.54 cw(c-1045.63,574.68) -1045.63,607 cw(c-1045.63,639.32) R9.2@-1068.48,616.47 ; -977.94,607 ccw(c-977.94,632.83) U5.4@-959.68,614.57 ; -968.3,607 cw(c-968.3,594.81) U5.4@-959.68,603.43
NetR10_1: R10.1 R13.1 U5.6 | length 410.3
  Top Layer w7.87: U5.6@-743.48,659 -539.37,659 ; U5.6@-712.32,653.43 cw(c-698.88,639.99) -698.88,659 cw(c-698.88,678.01) U5.6@-712.32,664.57 ; R13.1@-548.84,631.51 ccw(c-571.69,654.36) -539.37,654.36 ccw(c-507.05,654.36) R13.1@-529.91,631.51 ; R10.1@-548.84,687.38 cw(c-571.69,664.53) -539.37,664.53 cw(c-507.05,664.53) R10.1@-529.91,687.38 ; R13.1@-539.37,622.05 -539.37,659 ; R10.1@-539.37,696.85 -539.37,659
NetR11_1: R11.1 R12.1 U5.7 | length 532.8
  Top Layer w7.87: U5.7@-743.48,709 -738.9,713.58 -680.12,713.58 -656.42,713.58 R11.1@-599,771 -539.37,830.63 R12.1@-539.37,846.46 ; U5.7@-717.89,709 cw(c-706.83,697.94) -706.83,713.58 ; U5.7@-712.32,703.43 cw(c-687.82,678.93) -687.82,713.58 ; R11.1@-612.38,771 cw(c-644.7,771) -621.85,748.15 cw(c-599,725.3) R11.1@-599,757.61 ; R11.1@-599,784.38 ccw(c-599,816.7) -576.15,793.85 ccw(c-553.3,771) R11.1@-585.61,771 ; -573.42,796.58 ccw(c-623.29,846.46) R12.1@-552.76,846.46 ; -559.97,810.02 ccw(c-596.41,846.46) R12.1@-544.88,846.46 ; -546.53,823.47 ccw(c-569.52,846.46) R12.1@-537.01,846.46
NetR70_2: R70.2 U33.2 | length 340.2
  Top Layer w15.75: R70.2@1362.2,-122.05 1454.33,-29.92 U33.2@1454.33,15.75 ; R70.2@1362.2,-112.6 ccw(c1362.2,-89.79) R70.2@1378.33,-105.92 ; R70.2@1371.65,-122.05 cw(c1394.47,-122.05) R70.2@1378.34,-105.91 ; 1403.17,-81.08 ccw(c1331.93,-9.84) U33.2@1432.68,-9.84 ; 1430.05,-54.2 ccw(c1385.7,-9.84) U33.2@1448.43,-9.84
NetR71_2: R71.2 U32.2 | length 326.3
  Top Layer w15.75: R71.2@1559.05,-121 1653,-27.05 U32.2@1653,15.19 ; R71.2@1559.05,-112.6 ccw(c1559.05,-92.32) R71.2@1573.39,-106.66 ; R71.2@1568.5,-122.05 cw(c1593.85,-122.05) 1575.93,-104.13 ; 1604.26,-75.79 ccw(c1538.87,-10.4) U32.2@1631.35,-10.4 ; 1631.14,-48.91 ccw(c1592.64,-10.4) U32.2@1647.09,-10.4
NetR72_2: R72.2 U31.2 | length 326.3
  Top Layer w15.75: R72.2@1757.05,-121 1851,-27.05 U31.2@1851,15.19 ; R72.2@1757.05,-112.6 ccw(c1757.05,-92.32) R72.2@1771.39,-106.66 ; R72.2@1766.5,-122.05 cw(c1791.85,-122.05) 1773.93,-104.13 ; 1802.26,-75.79 ccw(c1736.87,-10.4) U31.2@1829.35,-10.4 ; 1829.14,-48.91 ccw(c1790.64,-10.4) U31.2@1845.09,-10.4
NetR73_2: R73.2 U30.2 | length 318.9
  Top Layer w19.68: R73.2@1961.05,-122 2052,-31.05 U30.2@2052,15.19 ; R73.2@1961.05,-114.52 ccw(c1961.05,-96.46) 1973.82,-109.23 ccw(c1986.59,-122) R73.2@1968.53,-122 ; 2003.79,-79.26 ccw(c1934.93,-10.4) U30.2@2032.31,-10.4 ; 2037.4,-45.66 ccw(c2002.14,-10.4) U30.2@2052,-10.4
NetR74_2: R74.2 U35.2 | length 331.1
  Top Layer w19.68: R74.2@1165.35,-122.05 1253.54,-33.86 U35.2@1253.54,15.75 ; R74.2@1165.35,-114.57 ccw(c1165.35,-96.51) 1178.12,-109.28 ccw(c1190.9,-122.05) R74.2@1172.83,-122.05 ; 1202.96,-84.44 ccw(c1128.36,-9.84) U35.2@1233.86,-9.84 ; 1236.56,-50.84 ccw(c1195.57,-9.84) U35.2@1253.54,-9.84
NetR75_2: R75.2 U36.2 | length 271.4
  Top Layer w19.68: R75.2@964.57,-135.39 R75.2@964.57,-123.58 ; R75.2@964.57,-110.24 1052.76,-22.05 U36.2@1052.76,15.75 ; R75.2@972.05,-122.05 cw(c1018.62,-122.05) 985.69,-89.12 ; 1010.52,-64.28 ccw(c956.08,-9.84) U36.2@1033.07,-9.84
NetR76_1: R76.1 U31.3 U34.5 U34.6 | length 1341.7
  Top Layer w7.87: U34.5@1605.51,500 U34.6@1655.51,500 ; U34.5@1611.08,494.43 cw(c1624.52,480.99) 1624.52,500 cw(c1624.52,519.01) U34.5@1611.08,505.57 ; U34.6@1649.94,494.43 ccw(c1636.5,480.99) 1636.5,500 ccw(c1636.5,519.01) U34.6@1649.94,505.57 ; U34.6@1655.51,464.57 cw(c1655.51,425.05) 1683.45,452.99 ; U34.6@1655.51,472.44 cw(c1655.51,451.94) 1670.01,466.43 ; U34.6@1655.51,527.56 cw(c1671.06,527.56) 1660.07,538.55 ; U34.6@1663.39,527.56 cw(c1697.95,527.56) 1673.51,552 ; R76.1@1726.76,1041.72 cw(c1703.9,1018.86) 1736.22,1018.86 cw(c1768.54,1018.86) R76.1@1745.69,1041.72 ; R76.1@1736.22,1051.18 1736.22,971.6 1681.89,917.26 1681.89,560.38 1655.51,534 U34.6@1655.51,500 ; 1793.8,419.24 ccw(c1847.47,472.91) U31.3@1850.33,397.07 ; 1806.55,406.49 ccw(c1848.39,448.33) U31.3@1850.63,389.2 ; 1819.31,393.73 ccw(c1849.32,423.75) U31.3@1850.93,381.33 ; 1819.56,393.48 cw(c1805.45,379.36) U31.3@1825.41,379.36 ; U31.3@1850.03,404.93 cw(c1846.54,497.49) 1781.04,432 ; U31.3@1851,353.77 1851,362.04 1781.04,432 ; U34.6@1655.51,500 1655.51,480.93 1704.44,432 1781.04,432
NetR77_1: R77.1 U32.3 U34.3 U34.4 | length 1202.4
  Top Layer w7.87: U34.3@1505.51,500 U34.4@1555.51,500 ; U34.3@1511.08,494.43 cw(c1524.52,480.99) 1524.52,500 cw(c1524.52,519.01) U34.3@1511.08,505.57 ; R77.1@1529.91,1041.72 cw(c1507.05,1018.86) 1539.37,1018.86 cw(c1571.69,1018.86) R77.1@1548.84,1041.72 ; R77.1@1539.37,1051.18 1539.37,970.63 1579.13,930.87 1579.13,556.13 1554,531 1554,485 1653,386 U32.3@1653,353.77 ; U34.4@1549.94,494.43 ccw(c1536.5,480.99) 1536.5,500 ccw(c1536.5,519.01) U34.4@1549.94,505.57 ; U34.4@1555.51,464.57 cw(c1555.51,418.88) 1587.81,451.19 ; U34.4@1555.51,472.44 cw(c1555.51,445.77) 1574.37,464.63 ; U34.4@1563.39,527.56 cw(c1594.35,527.56) 1572.46,549.46 ; 1604.62,434.38 cw(c1549.6,379.36) U32.3@1627.41,379.36 ; 1618.06,420.94 cw(c1576.49,379.36) U32.3@1635.28,379.36 ; 1620.65,418.35 ccw(c1653,450.71) U32.3@1653,404.95 ; U32.3@1631.5,407.5 cw(c1603.37,379.36) U32.3@1643.16,379.36 ; U32.3@1634.09,404.91 ccw(c1653,423.82) U32.3@1653,397.08
NetR78_1: R78.1 U33.3 U34.1 U34.2 | length 1157.7
  Top Layer w7.87: R78.1@1321.24,1041.72 cw(c1298.39,1018.86) 1330.71,1018.86 cw(c1363.03,1018.86) R78.1@1340.17,1041.72 ; R78.1@1330.71,1051.18 1330.71,1013.29 1403.06,940.94 1455.45,940.94 1479.13,917.26 1479.13,557.13 1458.06,536.06 1458.06,497 1455.05,500 U34.1@1405.51,500 ; U34.1@1411.08,494.43 cw(c1424.52,480.99) 1424.52,500 cw(c1424.52,519.01) U34.1@1411.08,505.57 ; U33.3@1436.24,398.02 ccw(c1392.55,441.7) 1454.33,441.7 ccw(c1516.11,441.7) U33.3@1472.43,398.02 ; U33.3@1441.8,392.45 ccw(c1411.56,422.69) 1454.33,422.69 ccw(c1497.1,422.69) U33.3@1466.86,392.45 ; U34.2@1449.94,466.87 cw(c1439.35,456.28) 1454.33,456.28 ; U34.2@1449.94,494.43 ccw(c1436.5,480.99) 1436.5,500 ccw(c1436.5,519.01) U34.2@1449.94,505.57 ; U33.3@1454.33,354.33 U34.2@1454.33,472.33 ; 1454.33,450.58 cw(c1477.37,450.58) U34.2@1461.08,466.87 ; U34.2@1463.39,527.56 cw(c1496.77,527.56) 1473.16,551.16
NetR79_1: R79.1 U35.3 U39.3 U39.4 | length 1364.7
  Top Layer w7.87: U39.3@1016,500 U39.4@1066,500 ; U39.3@1021.57,494.43 cw(c1035.01,480.99) 1035.01,500 cw(c1035.01,519.01) U39.3@1021.57,505.57 ; U39.4@1060.43,494.43 ccw(c1046.99,480.99) 1046.99,500 ccw(c1046.99,519.01) U39.4@1060.43,505.57 ; U39.4@1066,464.57 cw(c1066,424.3) 1094.47,452.77 ; U39.4@1066,472.44 cw(c1066,451.18) 1081.03,466.21 ; U39.4@1066,535.43 ccw(c1066,543.72) 1071.86,537.86 ; U39.4@1073.87,527.56 cw(c1103.6,527.56) 1082.58,548.58 ; R79.1@1112.53,1037.53 cw(c1089.68,1014.68) 1122,1014.68 cw(c1154.32,1014.68) R79.1@1131.46,1037.53 ; R79.1@1129.92,1051.18 1122,1043.26 1122,992.08 1090.55,960.63 1090.55,556.55 1066,532 U39.4@1066,500 ; 1188.18,421.04 ccw(c1245.48,478.34) U35.3@1252.1,397.58 ; 1200.21,409.02 ccw(c1247.3,456.11) U35.3@1252.74,389.73 ; 1212.23,396.99 ccw(c1249.12,433.88) U35.3@1253.38,381.88 ; U35.3@1224.26,384.96 ccw(c1250.94,411.65) U35.3@1254.03,374.04 ; U35.3@1251.45,405.43 cw(c1243.66,500.57) 1176.16,433.07 ; U35.3@1253.54,354.33 1253.54,355.68 1176.15,433.07 ; U39.4@1066,500 1066,481.25 1114.17,433.07 1176.15,433.07
NetR80_1: R80.1 U36.3 U39.1 U39.2 | length 1146.1
  Top Layer w7.87: U39.1@916,500 U39.2@966,500 ; U39.1@921.57,494.43 cw(c935.01,480.99) 935.01,500 cw(c935.01,519.01) U39.1@921.57,505.57 ; R80.1@927.54,1041.72 cw(c904.69,1018.86) 937.01,1018.86 cw(c969.32,1018.86) R80.1@946.47,1041.72 ; R80.1@937.01,1051.18 937.01,984.25 992.13,929.13 992.13,553.13 966,527 U39.2@966,500 ; U39.2@960.43,494.43 ccw(c946.99,480.99) 946.99,500 ccw(c946.99,519.01) U39.2@960.43,505.57 ; U39.2@966,535.43 ccw(c966,555.79) 980.4,541.4 ; U39.2@973.87,472.44 ccw(c1005.84,472.44) 983.24,449.83 ; U39.2@973.87,527.56 cw(c991.53,527.56) 979.05,540.05 ; 1008.79,424.28 cw(c964.43,379.92) U36.3@1027.17,379.92 ; 1009.74,423.33 ccw(c1052.76,466.34) U36.3@1052.76,405.51 ; 1022.23,410.84 cw(c991.32,379.92) U36.3@1035.04,379.92 ; 1023.19,409.89 ccw(c1052.76,439.46) U36.3@1052.76,397.64 ; U36.3@1052.76,354.33 1052.76,380.32 966,467.07 U39.2@966,500
NetR750_1: R750.1 U30.3 U34.7 U34.8 | length 1461.2
  Top Layer w7.87: U34.7@1705.51,500 U34.8@1755.51,500 1755.51,468.49 1776,448 2008,448 ; U34.7@1711.08,494.43 cw(c1724.52,480.99) 1724.52,500 cw(c1724.52,519.01) U34.7@1711.08,505.57 ; U34.8@1749.94,494.43 ccw(c1736.5,480.99) 1736.5,500 ccw(c1736.5,519.01) U34.8@1749.94,505.57 ; U34.8@1749.94,533.13 ccw(c1726.05,557.02) 1759.84,557.02 ; U34.8@1755.51,464.57 cw(c1755.51,455.1) 1762.21,461.79 ; U34.8@1759.84,504.33 1759.84,654.84 1937.01,832.01 R750.1@1937.01,1051.18 ; U34.8@1763.39,472.44 ccw(c1791.94,472.44) 1771.75,452.25 ; R750.1@1927.54,1041.72 cw(c1904.69,1018.86) 1937.01,1018.86 cw(c1969.32,1018.86) R750.1@1946.47,1041.72 ; 2018.31,437.69 cw(c1975.82,395.2) U30.3@2034.65,382.97 ; U30.3@2026.94,384.57 ccw(c1958.75,398.75) 2008,448 ; 2028.62,427.38 cw(c1992.89,391.65) U30.3@2042.36,381.36 ; 2038.93,417.07 cw(c2009.96,388.1) U30.3@2050.07,379.76 ; U30.3@2052,353.77 2052,404 2008,448
NetRd1_2: R51.2 Ud1.2 | length 341.1
  Top Layer w7.87: Ud1.2@128.91,-698.5 cw(c85.22,-742.18) 147,-742.18 cw(c208.78,-742.18) Ud1.2@165.1,-698.5 ; Ud1.2@134.47,-692.93 cw(c104.23,-723.17) 147,-723.17 cw(c189.77,-723.17) Ud1.2@159.53,-692.93 ; R51.2@137.54,-771.48 ccw(c114.68,-748.63) 147,-748.63 ccw(c179.32,-748.63) R51.2@156.47,-771.48 ; R51.2@147,-780.95 Ud1.2@147,-654.81
NetRd2_2: R52.2 Ud2.2 | length 364.8
  Top Layer w7.87: Ud2.2@335.91,-697.5 cw(c292.22,-741.18) 354,-741.18 cw(c415.78,-741.18) Ud2.2@372.1,-697.5 ; Ud2.2@341.47,-691.93 cw(c311.23,-722.17) 354,-722.17 cw(c396.77,-722.17) Ud2.2@366.53,-691.93 ; R52.2@346.54,-777.48 ccw(c328.51,-759.46) 354,-759.46 ; 354,-768.81 ccw(c374.14,-768.81) R52.2@359.9,-783.05 ; 354,-749.8 ccw(c393.15,-749.8) R52.2@365.47,-777.48 ; Ud2.2@354,-653.81 354,-784.95 R52.2@356,-786.95
NetRd3_2: R53.2 Ud3.2 | length 337.1
  Top Layer w7.87: Ud3.2@541.91,-696.5 cw(c498.22,-740.18) 560,-740.18 cw(c621.78,-740.18) Ud3.2@578.1,-696.5 ; Ud3.2@547.47,-690.93 cw(c517.23,-721.17) 560,-721.17 cw(c602.77,-721.17) Ud3.2@572.53,-690.93 ; R53.2@550.54,-765.48 ccw(c527.68,-742.63) 560,-742.63 ccw(c592.32,-742.63) R53.2@569.47,-765.48 ; R53.2@560,-774.95 Ud3.2@560,-652.81
NetRd4_2: R54.2 Ud4.2 | length 345.5
  Top Layer w7.87: Ud4.2@748.91,-696.5 cw(c705.22,-740.18) 767,-740.18 cw(c828.78,-740.18) Ud4.2@785.1,-696.5 ; Ud4.2@754.47,-690.93 cw(c724.23,-721.17) 767,-721.17 cw(c809.77,-721.17) Ud4.2@779.53,-690.93 ; R54.2@756.54,-773.48 ccw(c731.27,-748.21) 767,-748.21 ; R54.2@766,-782.95 767,-781.95 Ud4.2@767,-652.81 ; 767,-753.04 ccw(c795.9,-753.04) R54.2@775.47,-773.48
NRST: IC2.4 S2.1 | length 1229.1
  Top Layer w7.87: S2.1@-1377.13,1371.23 cw(c-1404.02,1344.35) -1366,1344.35 cw(c-1327.98,1344.34) S2.1@-1354.86,1371.23 ; v1@-1371.57,1277.57 ccw(c-1385.01,1291.01) -1366,1291.01 ccw(c-1346.99,1291.01) v1@-1360.43,1277.57 ; v1(-1366,1272) S2.1@-1366,1382.36
  Bottom Layer w7.87: IC2.4@-1515.26,394.26 -1483.76,425.76 -1483.76,1154.24 v1(-1366,1272) ; IC2.4@-1515.26,410.01 ccw(c-1515.26,448.03) -1488.38,421.14 ccw(c-1461.49,394.26) IC2.4@-1499.51,394.26 ; v1@-1373.87,1272 cw(c-1392.88,1272) -1379.44,1258.56 cw(c-1366,1245.12) v1@-1366,1264.13
OUTPUT1: OutA.1 U34.11 U34.12 | length 610.3
  Top Layer w19.68: U34.12@1705.51,879.92 U34.11@1755.51,879.92 1755.51,920.51 1791.34,956.34 1791.34,1248.34 ; U34.11@1757.48,907.48 cw(c1793.69,907.48) 1768.09,933.09 ; OutA.1@1798.34,1282.63 cw(c1768.89,1270.79) 1791.34,1248.34 ; OutA.1@1825.63,1255.34 ccw(c1813.79,1225.89) 1791.34,1248.34 ; OutA.1@1844,1301 1791.34,1248.34
OUTPUT2: OutA.2 U34.13 U34.14 | length 593.9
  Top Layer w19.68: OutA.2@1597.56,1282.63 cw(c1568.11,1270.79) 1590.55,1248.34 ; U34.14@1605.51,879.92 U34.13@1655.51,879.92 1655.51,911.42 1590.55,976.38 1590.55,1248.34 ; OutA.2@1624.85,1255.34 ccw(c1613,1225.9) 1590.55,1248.34 ; OutA.2@1643.21,1301 1590.55,1248.34
OUTPUT3: OutA.3 U34.15 U34.16 | length 720.8
  Top Layer w19.68: OutA.3@1394.84,1288.44 cw(c1346.64,1275.72) 1381.89,1240.47 ; OutA.3@1429.86,1253.42 ccw(c1417.14,1205.22) 1381.89,1240.47 ; OutA.3@1442.43,1301 1381.89,1240.47 ; U34.16@1505.51,879.92 U34.15@1555.51,879.92 1555.51,909.49 1496.5,968.5 1413.39,968.5 1381.89,1000 1381.89,1240.47
OUTPUT4: OutB.1 U34.17 U34.18 | length 788.8
  Top Layer w19.68: OutB.1@1195.28,1279.46 cw(c1171.48,1268.52) 1190,1250 ; OutB.1@1219.46,1255.28 ccw(c1208.52,1231.48) 1190,1250 ; OutB.1@1240,1300 1190,1250 ; 1355.1,930.33 ccw(c1405.51,980.73) U34.18@1405.51,909.45 ; 1388.71,896.72 ccw(c1405.51,913.53) U34.18@1405.51,889.76 ; U34.17@1455.51,879.92 U34.18@1405.51,879.92 1332.68,952.76 1212.6,952.76 1190,975.35 1190,1250
OUTPUT5: OutB.2 U39.15 U39.16 | length 570.5
  Top Layer w19.68: OutB.2@994.11,1280.31 cw(c968.18,1268.98) 988.19,1248.98 ; OutB.2@1019.52,1254.9 ccw(c1008.2,1228.97) 988.19,1248.98 ; OutB.2@1039.21,1300 988.19,1248.98 ; U39.15@1066,879.92 U39.16@1016,879.92 1016,936.76 988.19,964.57 988.19,1248.98
OUTPUT6: OutB.3 U39.17 U39.18 | length 647.2
  Top Layer w19.68: OutB.3@793.33,1280.31 cw(c767.4,1268.98) 787.4,1248.98 ; OutB.3@818.73,1254.9 ccw(c807.41,1228.98) 787.4,1248.98 ; OutB.3@838.43,1300 787.4,1248.98 ; U39.17@966,879.92 U39.18@916,879.92 856.3,879.92 787.4,948.82 787.4,1248.98
PD10: IC2.13 R8.1 | length 561.1
  Top Layer w7.87: R8.1@-1137,680.61 cw(c-1137,648.3) -1114.15,671.15 cw(c-1091.3,694) R8.1@-1123.62,694 ; R8.1@-1137,694 -1105.83,662.83 -1060.15,662.83 -1059.32,662 v1(-1012,662) ; v1@-1017.57,656.43 ccw(c-1031.01,642.99) -1031.01,662 ccw(c-1031.01,681.01) v1@-1017.57,667.57
  Bottom Layer w7.87: IC2.13@-1121.56,473 -990,604.56 -990,640 v1(-1012,662) ; IC2.13@-1121.56,488.75 ccw(c-1121.56,526.77) -1094.68,499.88 ccw(c-1067.79,473) IC2.13@-1105.81,473 ; v1@-1012,654.13 cw(c-1012,635.12) -998.56,648.56 cw(c-985.12,662) v1@-1004.13,662
PWM1: IC2.45 R37.1 U10.1 | length 647.3
  Top Layer w7.87: IC2.45@-570.38,-290.78 cw(c-570.38,-328.8) -543.49,-301.91 cw(c-516.61,-275.03) IC2.45@-554.63,-275.03 ; IC2.45@-570.38,-275.03 -523.41,-322 -403,-322 R37.1@-324.5,-400.5 ; -350.97,-374.03 ccw(c-323,-346.05) R37.1@-323,-385.61 ; -343.73,-381.27 cw(c-361.45,-399) R37.1@-336.38,-399 ; U10.1@-338.35,-500.76 ccw(c-372.99,-466.12) -324,-466.12 ; R37.1@-337.53,-387.47 ccw(c-323,-372.93) R37.1@-323,-393.49 ; U10.1@-332.78,-506.33 ccw(c-353.98,-485.13) -324,-485.13 ; U10.1@-332.65,-506.47 -324,-497.82 R37.1@-324,-400 ; R37.1@-332.46,-408.46 cw(c-352.9,-428.9) -324,-428.9 ; -324,-433.73 cw(c-288.27,-433.73) R37.1@-313.53,-408.46
PWM1+: JP1.1 R30.1 U10.4 | length 2432.1
  Top Layer w7.87: JP1.1@-405.97,-1268.02 ccw(c-500.07,-1173.93) -367,-1173.93 ccw(c-233.93,-1173.93) JP1.1@-328.02,-1268.02 ; JP1.1@-400.41,-1273.59 ccw(c-481.06,-1192.94) -367,-1192.94 ccw(c-252.94,-1192.94) JP1.1@-333.59,-1273.59 ; JP1.1@-394.84,-1279.16 ccw(c-462.05,-1211.95) -367,-1211.95 ccw(c-271.95,-1211.95) JP1.1@-339.16,-1279.16 ; JP1.1@-389.27,-1284.73 ccw(c-443.04,-1230.96) -367,-1230.96 ccw(c-290.96,-1230.96) JP1.1@-344.73,-1284.73 ; -385.96,-698.1 ccw(c-427.59,-656.47) U10.4@-368.71,-656.47 ; -372.51,-684.66 ccw(c-400.71,-656.47) U10.4@-360.84,-656.47 ; JP1.1@-367,-1275.5 ccw(c-367,-1199.46) -313.23,-1253.23 ccw(c-259.46,-1307) JP1.1@-335.5,-1307 ; JP1.1@-367,-1267.63 ccw(c-367,-1172.58) -299.79,-1239.79 ccw(c-232.58,-1307) JP1.1@-327.63,-1307 ; JP1.1@-367,-1259.75 ccw(c-367,-1145.7) -286.35,-1226.35 ccw(c-205.7,-1307) JP1.1@-319.75,-1307 ; JP1.1@-367,-1251.88 ccw(c-367,-1118.81) -272.91,-1212.91 ccw(c-178.81,-1307) JP1.1@-311.88,-1307 ; -359.07,-671.22 ccw(c-373.82,-656.47) U10.4@-352.96,-656.47 ; U10.4@-332.65,-656.47 -353.46,-656.47 -353.46,-665.61 -399.62,-711.77 -399.62,-1117.28 -367,-1149.9 JP1.1@-367,-1307 -240,-1180 R30.1@-240,-1090 ; R30.1@-249.46,-1099.47 cw(c-272.32,-1122.32) -240,-1122.32 cw(c-207.68,-1122.32) R30.1@-230.53,-1099.47